# EAGLE board SparkFun-Photon-Wearable-Shield-Panel-v10 (EAGLE 7.3.0)
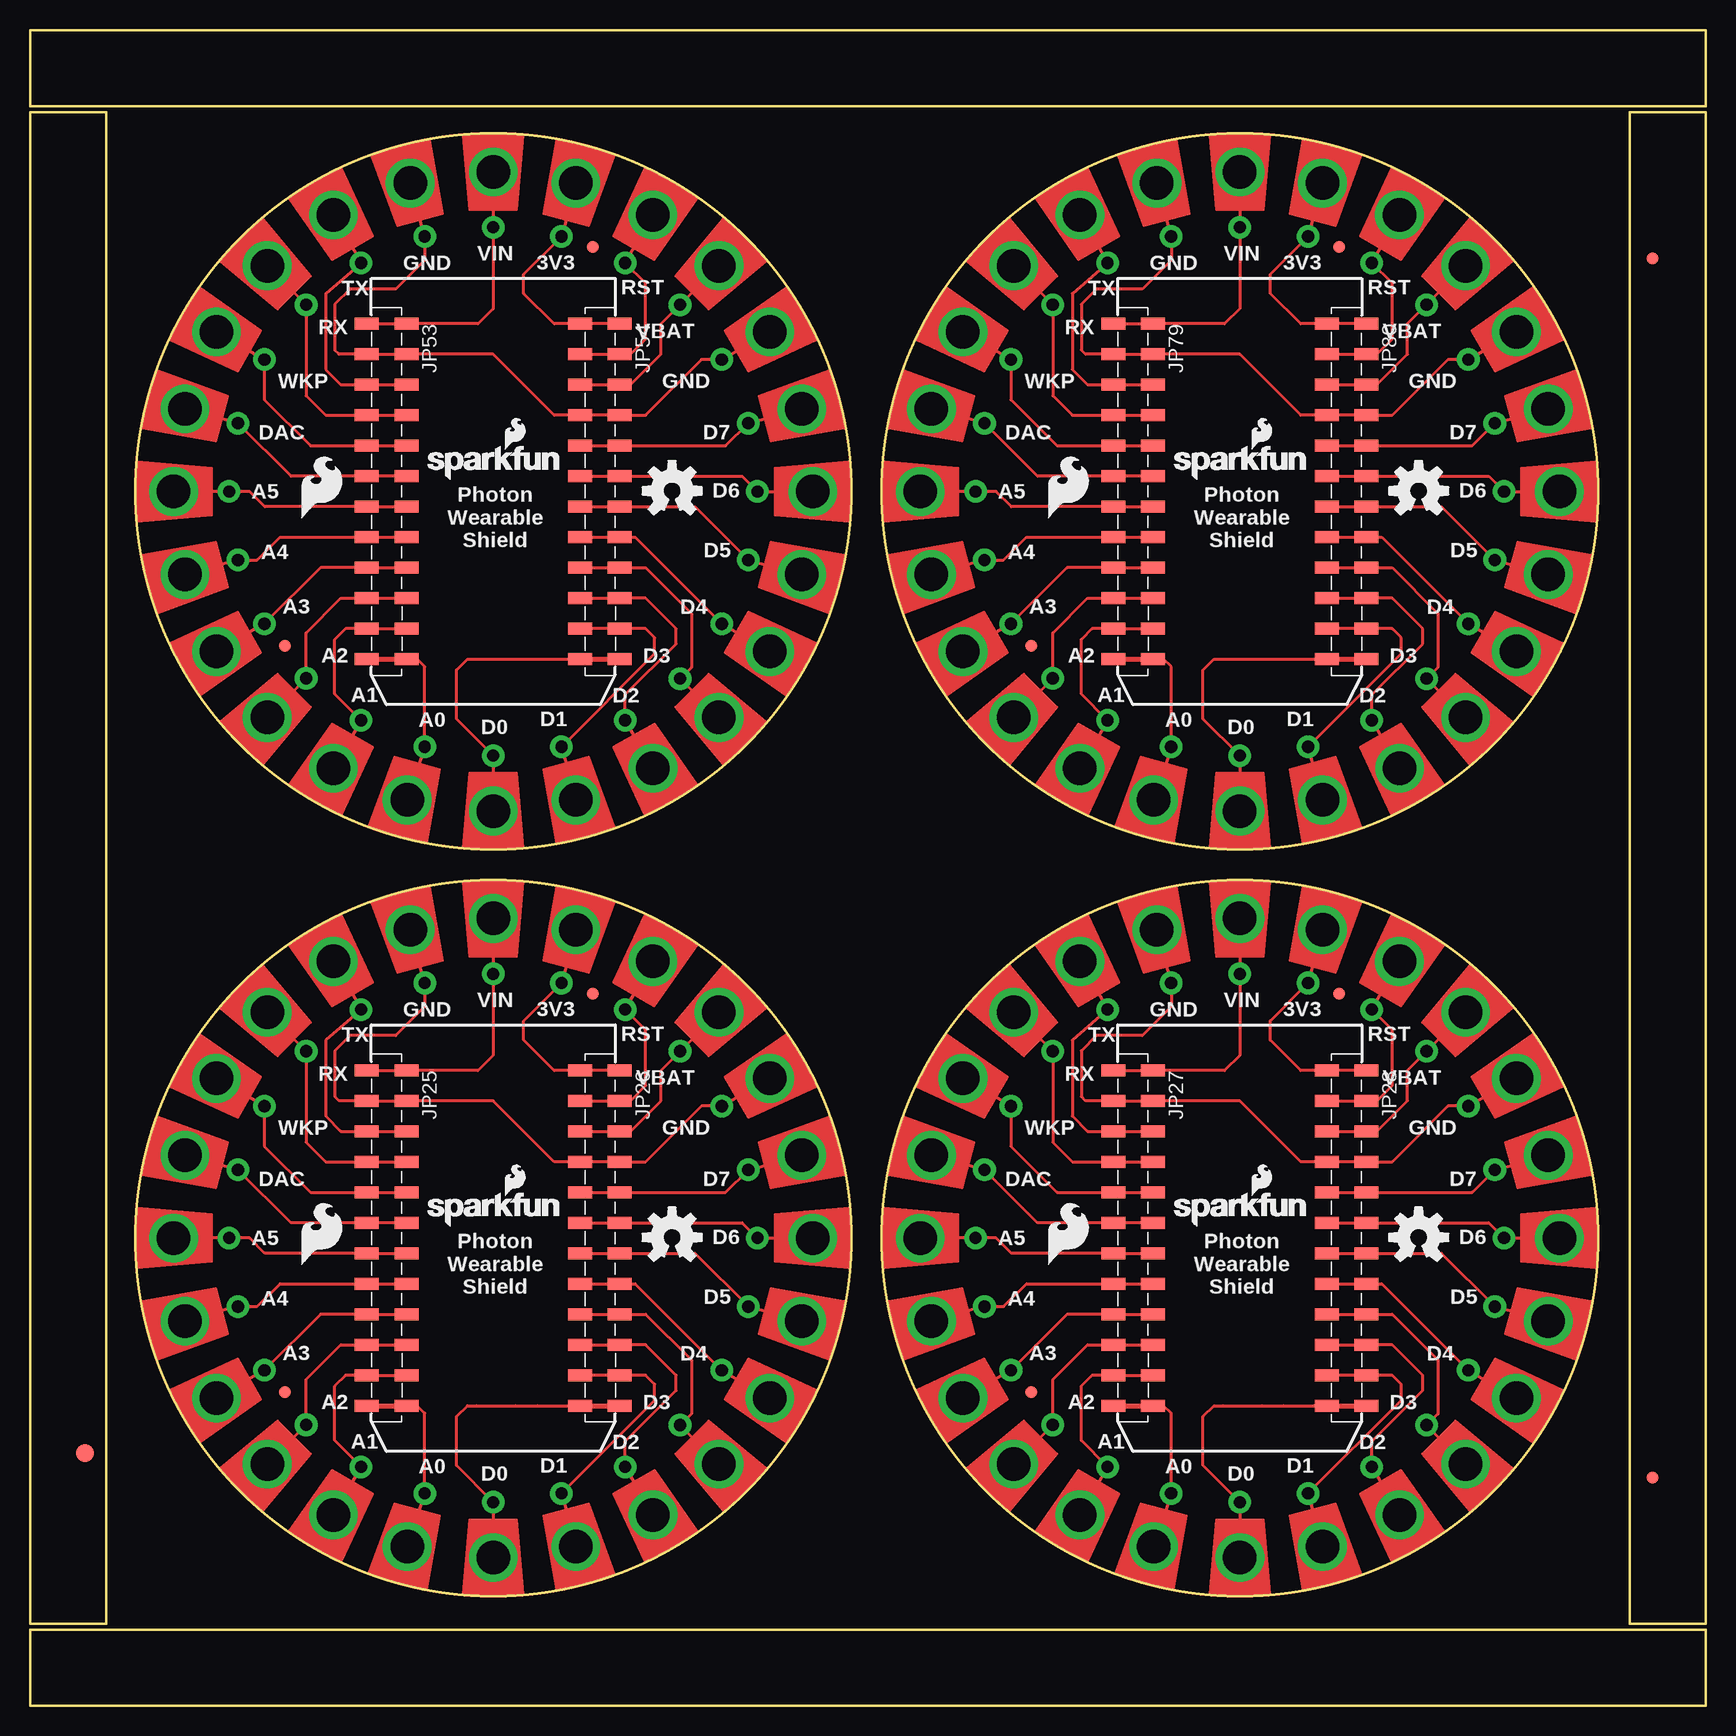
[diagram p0: board, top side]
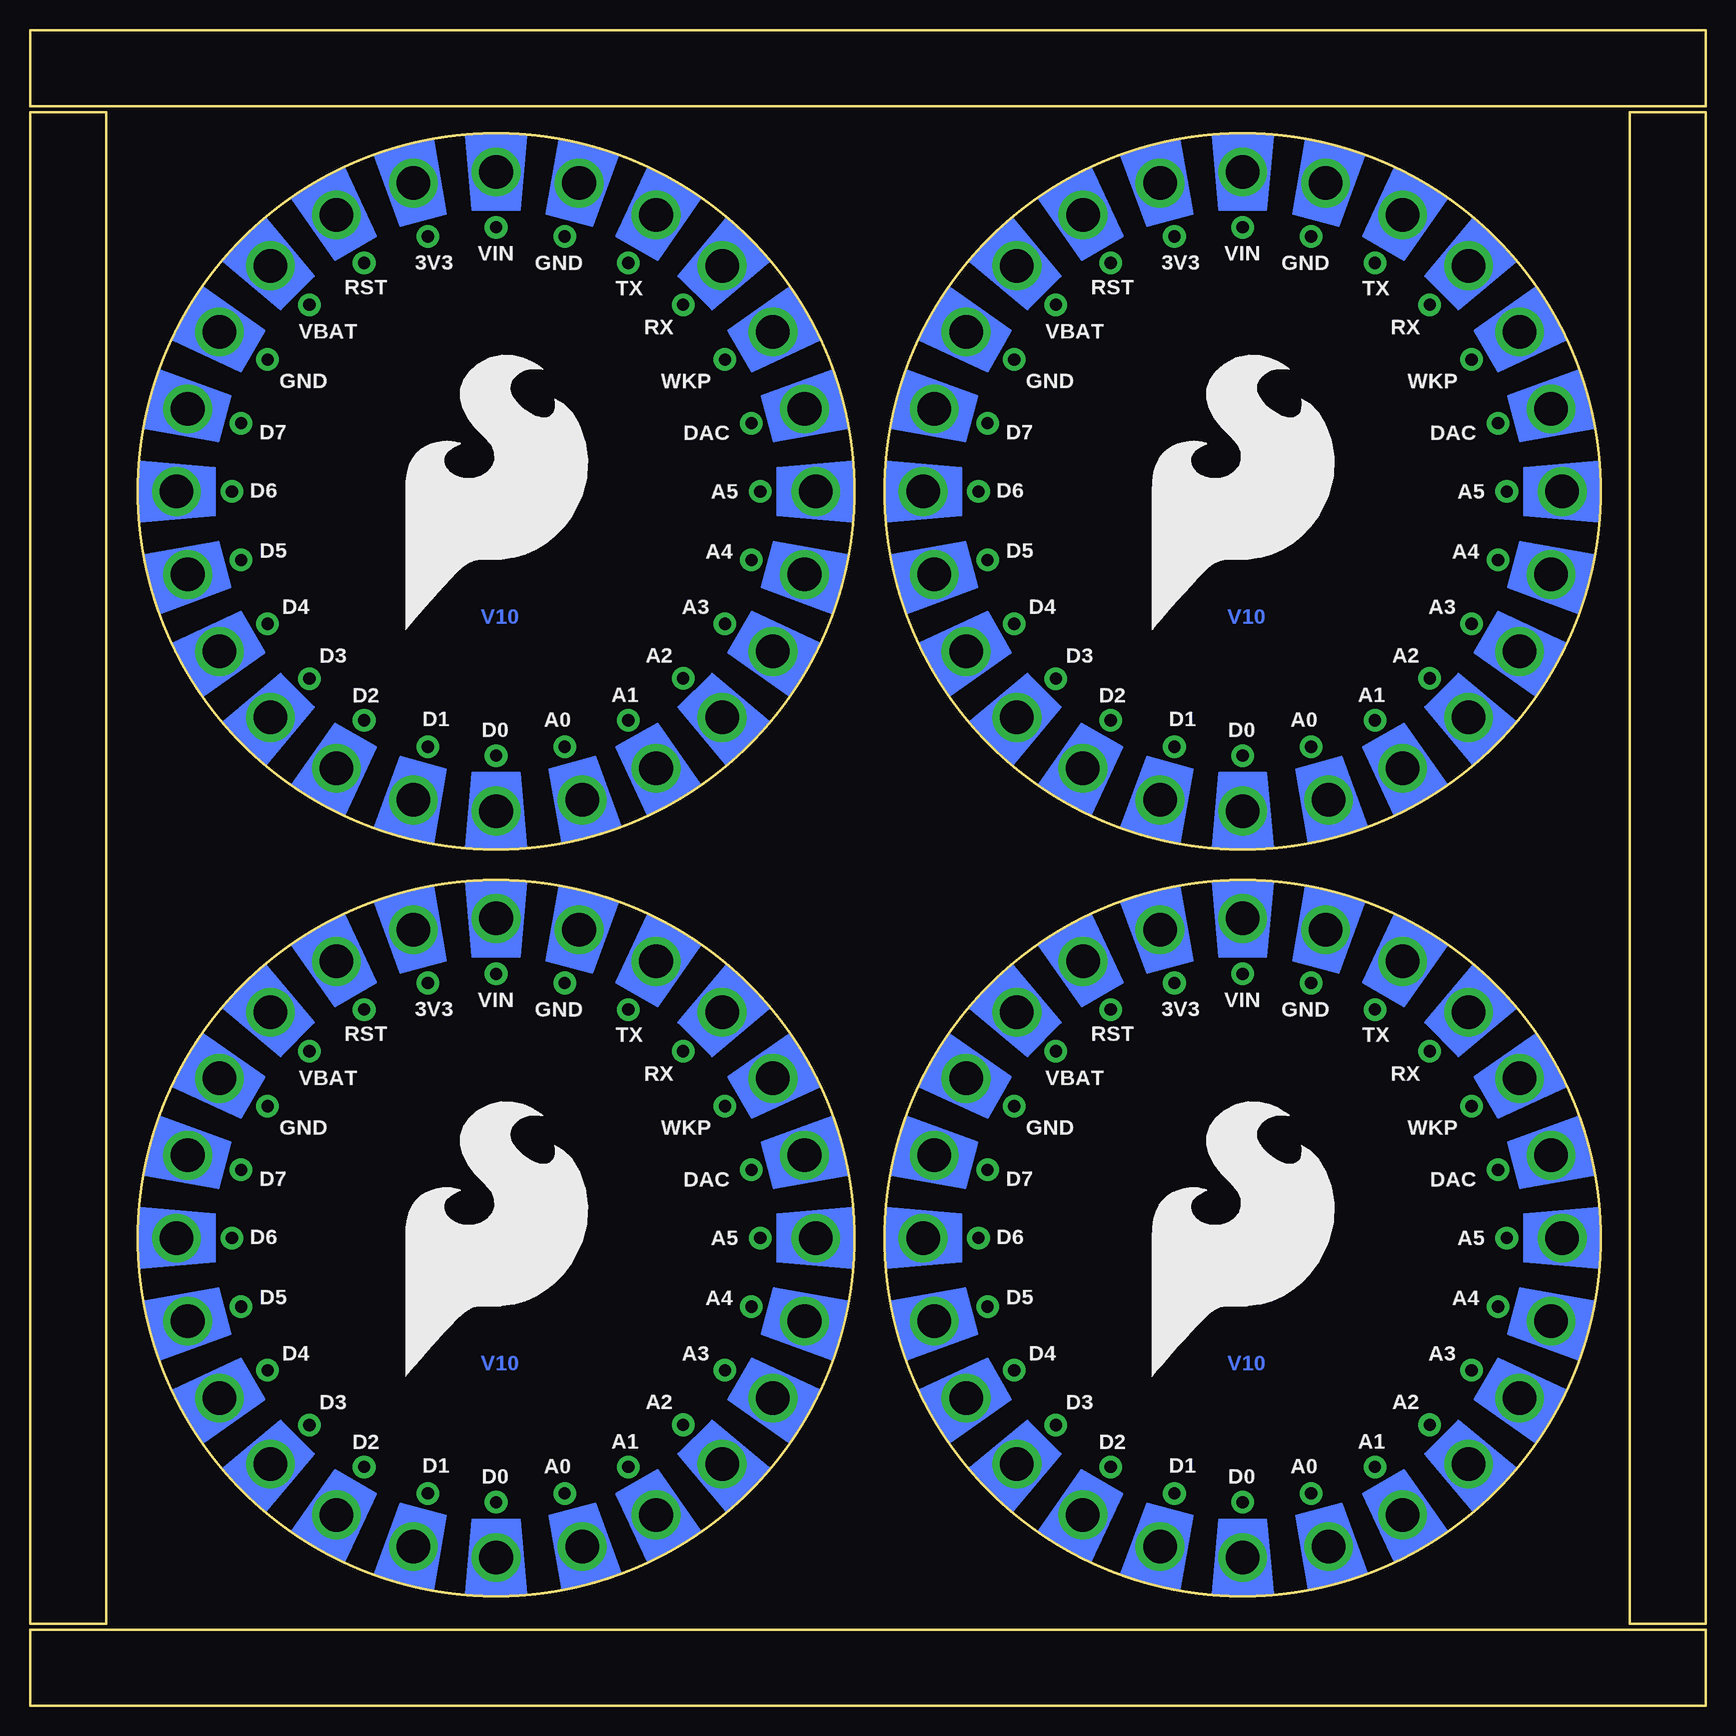
[diagram p1: board, bottom side, seen from below]

Size 139.7 x 139.7 mm. Coordinates in mm from the lower left corner, seen from the top.
Outline: 6.35,81.28 6.35,6.86 0,6.86 0,31.75
Outline: 80.01,0 0,0 0,6.35 30.48,6.35
Outline: 27.94,6.35 139.7,6.35 139.7,0 77.47,0
Outline: 139.7,96.52 139.7,6.86 133.35,6.86 133.35,46.99
Outline: 133.35,45.72 133.35,132.84 139.7,132.84 139.7,95.25
Outline: 59.69,139.7 139.7,139.7 139.7,133.35 109.22,133.35
Outline: 110.49,133.35 0,133.35 0,139.7 60.96,139.7
Outline: 0,30.48 0,132.84 6.35,132.84 6.35,80.01
Outline: circle at 38.62,39 radius 29.84
Outline: circle at 100.85,39 radius 29.84
Outline: circle at 38.62,101.23 radius 29.84
Outline: circle at 100.85,101.23 radius 29.84
Copper layers (1*16): Top 0.035mm / dielectric 1.5mm / Bottom 0.035mm
Design rules "default *": minimum track width 10mil, minimum drill 24mil, track to track 8mil, track to pad 8mil, pad to pad 8mil, via to via 8mil, smd to smd 8mil, copper to edge 40mil, drill to drill 8mil, minimum pad ring 10mil, minimum via ring 8mil, stop-mask expansion 4mil, vias tented up to drill 0mil, thermal gap 10mil

## Footprints (pad centres in the part's own frame; a part is rotated, then mirrored left to right if it is on the bottom)
FIDUCIAL-1.5X3 = smd 1.5 x 1.5: 1 0,0
FIDUCIAL-1X2 = smd 1 x 1: 1 0,0
PAD-LONG-2-SIDED = drill 2.794 pad 4.064: 1 3.205,0
1X01NS = drill 1.016 pad 1.88: 1 0,0
1X12_SMD_COMBINED = smd 1 x 2: 1A 0,1.65; 1B 0,-1.65; 2A 2.54,1.65; 2B 2.54,-1.65; 3A 5.08,1.65; 3B 5.08,-1.65; 4A 7.62,1.65; 4B 7.62,-1.65; 5A 10.16,1.65; 5B 10.16,-1.65; 6A 12.7,1.65; 6B 12.7,-1.65; 7A 15.24,1.65; 7B 15.24,-1.65; 8A 17.78,1.65; 8B 17.78,-1.65; 9A 20.32,1.65; 9B 20.32,-1.65; 10A 22.86,1.65; 10B 22.86,-1.65; 11A 25.4,1.65; 11B 25.4,-1.65; 12A 27.94,1.65; 12B 27.94,-1.65

## Placement (x,y rotation side)
E$1  [FIDUCIAL-1.5X3]  4.57,21.08 0 top
E$4  [FIDUCIAL-1X2]  135.25,19.05 0 top
E$5  [FIDUCIAL-1X2]  135.25,120.65 180 top
FID1  FIDUCIAL1X2  [FIDUCIAL-1X2]  46.91,59.38 0 top
FID2  FIDUCIAL1X2  [FIDUCIAL-1X2]  21.24,26.15 0 top
FID3  FIDUCIAL1X2  [FIDUCIAL-1X2]  109.14,59.38 0 top
FID4  FIDUCIAL1X2  [FIDUCIAL-1X2]  83.47,26.15 0 top
FID5  FIDUCIAL1X2  [FIDUCIAL-1X2]  46.91,121.61 0 top
FID6  FIDUCIAL1X2  [FIDUCIAL-1X2]  21.24,88.38 0 top
FID7  FIDUCIAL1X2  [FIDUCIAL-1X2]  109.14,121.61 0 top
FID8  FIDUCIAL1X2  [FIDUCIAL-1X2]  83.47,88.38 0 top
J1  PAD  [PAD-LONG-2-SIDED]  38.62,68.85 270 top
J2  PAD  [PAD-LONG-2-SIDED]  30.87,67.8 285 top
J3  PAD  [PAD-LONG-2-SIDED]  23.68,64.83 300 top
J4  PAD  [PAD-LONG-2-SIDED]  17.51,60.08 315 top
J5  PAD  [PAD-LONG-2-SIDED]  12.76,53.91 330 top
J6  PAD  [PAD-LONG-2-SIDED]  9.81,46.72 345 top
J7  PAD  [PAD-LONG-2-SIDED]  8.77,39 0 top
J8  PAD  [PAD-LONG-2-SIDED]  9.81,31.25 15 top
J9  PAD  [PAD-LONG-2-SIDED]  12.76,24.07 30 top
J10  PAD  [PAD-LONG-2-SIDED]  17.51,17.89 45 top
J11  PAD  [PAD-LONG-2-SIDED]  23.68,13.14 60 top
J12  PAD  [PAD-LONG-2-SIDED]  30.62,10.2 75 top
J13  PAD  [PAD-LONG-2-SIDED]  46.34,67.8 255 top
J14  PAD  [PAD-LONG-2-SIDED]  53.53,64.83 240 top
J15  PAD  [PAD-LONG-2-SIDED]  59.7,60.08 225 top
J16  PAD  [PAD-LONG-2-SIDED]  64.45,53.91 210 top
J17  PAD  [PAD-LONG-2-SIDED]  67.42,46.72 195 top
J18  PAD  [PAD-LONG-2-SIDED]  68.46,39 180 top
J19  PAD  [PAD-LONG-2-SIDED]  67.42,31.25 165 top
J20  PAD  [PAD-LONG-2-SIDED]  64.45,24.07 150 top
J21  PAD  [PAD-LONG-2-SIDED]  59.7,17.89 135 top
J22  PAD  [PAD-LONG-2-SIDED]  53.54,13.14 120 top
J23  PAD  [PAD-LONG-2-SIDED]  46.34,10.2 105 top
J24  PAD  [PAD-LONG-2-SIDED]  38.62,9.16 90 top
J25  PAD  [PAD-LONG-2-SIDED]  100.85,68.85 270 top
J26  PAD  [PAD-LONG-2-SIDED]  93.1,67.8 285 top
J27  PAD  [PAD-LONG-2-SIDED]  85.91,64.83 300 top
J28  PAD  [PAD-LONG-2-SIDED]  79.74,60.08 315 top
J29  PAD  [PAD-LONG-2-SIDED]  74.99,53.91 330 top
J30  PAD  [PAD-LONG-2-SIDED]  72.04,46.72 345 top
J31  PAD  [PAD-LONG-2-SIDED]  71,39 0 top
J32  PAD  [PAD-LONG-2-SIDED]  72.04,31.25 15 top
J33  PAD  [PAD-LONG-2-SIDED]  74.99,24.07 30 top
J34  PAD  [PAD-LONG-2-SIDED]  79.74,17.89 45 top
J35  PAD  [PAD-LONG-2-SIDED]  85.91,13.14 60 top
J36  PAD  [PAD-LONG-2-SIDED]  92.85,10.2 75 top
J37  PAD  [PAD-LONG-2-SIDED]  100.85,9.16 90 top
J38  PAD  [PAD-LONG-2-SIDED]  108.57,10.2 105 top
J39  PAD  [PAD-LONG-2-SIDED]  115.77,13.14 120 top
J40  PAD  [PAD-LONG-2-SIDED]  121.93,17.89 135 top
J41  PAD  [PAD-LONG-2-SIDED]  126.68,24.07 150 top
J42  PAD  [PAD-LONG-2-SIDED]  129.65,31.25 165 top
J43  PAD  [PAD-LONG-2-SIDED]  130.69,39 180 top
J44  PAD  [PAD-LONG-2-SIDED]  129.65,46.72 195 top
J45  PAD  [PAD-LONG-2-SIDED]  126.68,53.91 210 top
J46  PAD  [PAD-LONG-2-SIDED]  121.93,60.08 225 top
J47  PAD  [PAD-LONG-2-SIDED]  115.76,64.83 240 top
J48  PAD  [PAD-LONG-2-SIDED]  108.57,67.8 255 top
J49  PAD  [PAD-LONG-2-SIDED]  38.62,131.08 270 top
J50  PAD  [PAD-LONG-2-SIDED]  30.87,130.03 285 top
J51  PAD  [PAD-LONG-2-SIDED]  23.68,127.06 300 top
J52  PAD  [PAD-LONG-2-SIDED]  17.51,122.31 315 top
J53  PAD  [PAD-LONG-2-SIDED]  12.76,116.14 330 top
J54  PAD  [PAD-LONG-2-SIDED]  9.81,108.95 345 top
J55  PAD  [PAD-LONG-2-SIDED]  8.77,101.23 0 top
J56  PAD  [PAD-LONG-2-SIDED]  9.81,93.48 15 top
J57  PAD  [PAD-LONG-2-SIDED]  12.76,86.3 30 top
J58  PAD  [PAD-LONG-2-SIDED]  17.51,80.12 45 top
J59  PAD  [PAD-LONG-2-SIDED]  23.68,75.37 60 top
J60  PAD  [PAD-LONG-2-SIDED]  30.62,72.43 75 top
J61  PAD  [PAD-LONG-2-SIDED]  38.62,71.39 90 top
J62  PAD  [PAD-LONG-2-SIDED]  46.34,72.43 105 top
J63  PAD  [PAD-LONG-2-SIDED]  53.54,75.37 120 top
J64  PAD  [PAD-LONG-2-SIDED]  59.7,80.12 135 top
J65  PAD  [PAD-LONG-2-SIDED]  64.45,86.3 150 top
J66  PAD  [PAD-LONG-2-SIDED]  67.42,93.48 165 top
J67  PAD  [PAD-LONG-2-SIDED]  68.46,101.23 180 top
J68  PAD  [PAD-LONG-2-SIDED]  67.42,108.95 195 top
J69  PAD  [PAD-LONG-2-SIDED]  64.45,116.14 210 top
J70  PAD  [PAD-LONG-2-SIDED]  59.7,122.31 225 top
J71  PAD  [PAD-LONG-2-SIDED]  53.53,127.06 240 top
J72  PAD  [PAD-LONG-2-SIDED]  46.34,130.03 255 top
J73  PAD  [PAD-LONG-2-SIDED]  100.85,131.08 270 top
J74  PAD  [PAD-LONG-2-SIDED]  93.1,130.03 285 top
J75  PAD  [PAD-LONG-2-SIDED]  85.91,127.06 300 top
J76  PAD  [PAD-LONG-2-SIDED]  79.74,122.31 315 top
J77  PAD  [PAD-LONG-2-SIDED]  74.99,116.14 330 top
J78  PAD  [PAD-LONG-2-SIDED]  72.04,108.95 345 top
J79  PAD  [PAD-LONG-2-SIDED]  71,101.23 0 top
J80  PAD  [PAD-LONG-2-SIDED]  72.04,93.48 15 top
J81  PAD  [PAD-LONG-2-SIDED]  74.99,86.3 30 top
J82  PAD  [PAD-LONG-2-SIDED]  79.74,80.12 45 top
J83  PAD  [PAD-LONG-2-SIDED]  85.91,75.37 60 top
J84  PAD  [PAD-LONG-2-SIDED]  92.85,72.43 75 top
J85  PAD  [PAD-LONG-2-SIDED]  100.85,71.39 90 top
J86  PAD  [PAD-LONG-2-SIDED]  108.57,72.43 105 top
J87  PAD  [PAD-LONG-2-SIDED]  115.77,75.37 120 top
J88  PAD  [PAD-LONG-2-SIDED]  121.93,80.12 135 top
J89  PAD  [PAD-LONG-2-SIDED]  126.68,86.3 150 top
J90  PAD  [PAD-LONG-2-SIDED]  129.65,93.48 165 top
J91  PAD  [PAD-LONG-2-SIDED]  130.69,101.23 180 top
J92  PAD  [PAD-LONG-2-SIDED]  129.65,108.95 195 top
J93  PAD  [PAD-LONG-2-SIDED]  126.68,116.14 210 top
J94  PAD  [PAD-LONG-2-SIDED]  121.93,122.31 225 top
J95  PAD  [PAD-LONG-2-SIDED]  115.76,127.06 240 top
J96  PAD  [PAD-LONG-2-SIDED]  108.57,130.03 255 top
JP1  M01SMDNS  [1X01NS]  38.62,61.02 270 top
JP2  M01SMDNS  [1X01NS]  32.9,60.26 285 top
JP3  M01SMDNS  [1X01NS]  27.59,58.05 300 top
JP4  M01SMDNS  [1X01NS]  23.02,54.57 315 top
JP5  M01SMDNS  [1X01NS]  19.54,50 330 top
JP6  M01SMDNS  [1X01NS]  17.33,44.69 345 top
JP7  M01SMDNS  [1X01NS]  16.59,39 0 top
JP8  M01SMDNS  [1X01NS]  17.33,33.29 15 top
JP9  M01SMDNS  [1X01NS]  19.54,27.98 30 top
JP10  M01SMDNS  [1X01NS]  23.02,23.43 45 top
JP11  M01SMDNS  [1X01NS]  27.59,19.93 60 top
JP12  M01SMDNS  [1X01NS]  32.9,17.72 75 top
JP13  M01SMDNS  [1X01NS]  44.31,60.26 255 top
JP14  M01SMDNS  [1X01NS]  49.61,58.05 240 top
JP15  M01SMDNS  [1X01NS]  54.19,54.57 225 top
JP16  M01SMDNS  [1X01NS]  57.67,50 210 top
JP17  M01SMDNS  [1X01NS]  59.88,44.69 195 top
JP18  M01SMDNS  [1X01NS]  60.64,39 180 top
JP19  M01SMDNS  [1X01NS]  59.88,33.29 165 top
JP20  M01SMDNS  [1X01NS]  57.67,27.98 150 top
JP21  M01SMDNS  [1X01NS]  54.19,23.4 135 top
JP22  M01SMDNS  [1X01NS]  49.61,19.93 120 top
JP23  M01SMDNS  [1X01NS]  44.31,17.72 105 top
JP24  M01SMDNS  [1X01NS]  38.62,16.98 90 top
JP25  M12SMD_COMBINED  [1X12_SMD_COMBINED]  29.73,52.97 270 top
JP26  M12SMD_COMBINED  [1X12_SMD_COMBINED]  47.51,52.97 270 top
JP27  M12SMD_COMBINED  [1X12_SMD_COMBINED]  91.96,52.97 270 top
JP28  M12SMD_COMBINED  [1X12_SMD_COMBINED]  109.74,52.97 270 top
JP29  M01SMDNS  [1X01NS]  100.85,61.02 270 top
JP30  M01SMDNS  [1X01NS]  89.82,58.05 300 top
JP31  M01SMDNS  [1X01NS]  95.13,60.26 285 top
JP32  M01SMDNS  [1X01NS]  85.25,54.57 315 top
JP33  M01SMDNS  [1X01NS]  81.77,50 330 top
JP34  M01SMDNS  [1X01NS]  79.56,44.69 345 top
JP35  M01SMDNS  [1X01NS]  78.82,39 0 top
JP36  M01SMDNS  [1X01NS]  79.56,33.29 15 top
JP37  M01SMDNS  [1X01NS]  81.77,27.98 30 top
JP38  M01SMDNS  [1X01NS]  85.25,23.43 45 top
JP39  M01SMDNS  [1X01NS]  89.82,19.93 60 top
JP40  M01SMDNS  [1X01NS]  95.13,17.72 75 top
JP41  M01SMDNS  [1X01NS]  100.85,16.98 90 top
JP42  M01SMDNS  [1X01NS]  106.54,17.72 105 top
JP43  M01SMDNS  [1X01NS]  111.84,19.93 120 top
JP44  M01SMDNS  [1X01NS]  116.42,23.4 135 top
JP45  M01SMDNS  [1X01NS]  119.9,27.98 150 top
JP46  M01SMDNS  [1X01NS]  122.11,33.29 165 top
JP47  M01SMDNS  [1X01NS]  122.87,39 180 top
JP48  M01SMDNS  [1X01NS]  122.11,44.69 195 top
JP49  M01SMDNS  [1X01NS]  119.9,50 210 top
JP50  M01SMDNS  [1X01NS]  116.42,54.57 225 top
JP51  M01SMDNS  [1X01NS]  111.84,58.05 240 top
JP52  M01SMDNS  [1X01NS]  106.54,60.26 255 top
JP53  M12SMD_COMBINED  [1X12_SMD_COMBINED]  29.73,115.2 270 top
JP54  M12SMD_COMBINED  [1X12_SMD_COMBINED]  47.51,115.2 270 top
JP55  M01SMDNS  [1X01NS]  38.62,123.25 270 top
JP56  M01SMDNS  [1X01NS]  27.59,120.28 300 top
JP57  M01SMDNS  [1X01NS]  32.9,122.49 285 top
JP58  M01SMDNS  [1X01NS]  23.02,116.8 315 top
JP59  M01SMDNS  [1X01NS]  19.54,112.23 330 top
JP60  M01SMDNS  [1X01NS]  17.33,106.92 345 top
JP61  M01SMDNS  [1X01NS]  16.59,101.23 0 top
JP62  M01SMDNS  [1X01NS]  17.33,95.52 15 top
JP63  M01SMDNS  [1X01NS]  19.54,90.21 30 top
JP64  M01SMDNS  [1X01NS]  23.02,85.66 45 top
JP65  M01SMDNS  [1X01NS]  27.59,82.16 60 top
JP66  M01SMDNS  [1X01NS]  32.9,79.95 75 top
JP67  M01SMDNS  [1X01NS]  38.62,79.21 90 top
JP68  M01SMDNS  [1X01NS]  44.31,79.95 105 top
JP69  M01SMDNS  [1X01NS]  49.61,82.16 120 top
JP70  M01SMDNS  [1X01NS]  54.19,85.63 135 top
JP71  M01SMDNS  [1X01NS]  57.67,90.21 150 top
JP72  M01SMDNS  [1X01NS]  59.88,95.52 165 top
JP73  M01SMDNS  [1X01NS]  60.64,101.23 180 top
JP74  M01SMDNS  [1X01NS]  59.88,106.92 195 top
JP75  M01SMDNS  [1X01NS]  57.67,112.23 210 top
JP76  M01SMDNS  [1X01NS]  54.19,116.8 225 top
JP77  M01SMDNS  [1X01NS]  49.61,120.28 240 top
JP78  M01SMDNS  [1X01NS]  44.31,122.49 255 top
JP79  M12SMD_COMBINED  [1X12_SMD_COMBINED]  91.96,115.2 270 top
JP80  M12SMD_COMBINED  [1X12_SMD_COMBINED]  109.74,115.2 270 top
JP81  M01SMDNS  [1X01NS]  100.85,123.25 270 top
JP82  M01SMDNS  [1X01NS]  89.82,120.28 300 top
JP83  M01SMDNS  [1X01NS]  95.13,122.49 285 top
JP84  M01SMDNS  [1X01NS]  85.25,116.8 315 top
JP85  M01SMDNS  [1X01NS]  81.77,112.23 330 top
JP86  M01SMDNS  [1X01NS]  79.56,106.92 345 top
JP87  M01SMDNS  [1X01NS]  78.82,101.23 0 top
JP88  M01SMDNS  [1X01NS]  79.56,95.52 15 top
JP89  M01SMDNS  [1X01NS]  81.77,90.21 30 top
JP90  M01SMDNS  [1X01NS]  85.25,85.66 45 top
JP91  M01SMDNS  [1X01NS]  89.82,82.16 60 top
JP92  M01SMDNS  [1X01NS]  95.13,79.95 75 top
JP93  M01SMDNS  [1X01NS]  100.85,79.21 90 top
JP94  M01SMDNS  [1X01NS]  106.54,79.95 105 top
JP95  M01SMDNS  [1X01NS]  111.84,82.16 120 top
JP96  M01SMDNS  [1X01NS]  116.42,85.63 135 top
JP97  M01SMDNS  [1X01NS]  119.9,90.21 150 top
JP98  M01SMDNS  [1X01NS]  122.11,95.52 165 top
JP99  M01SMDNS  [1X01NS]  122.87,101.23 180 top
JP100  M01SMDNS  [1X01NS]  122.11,106.92 195 top
JP101  M01SMDNS  [1X01NS]  119.9,112.23 210 top
JP102  M01SMDNS  [1X01NS]  116.42,116.8 225 top
JP103  M01SMDNS  [1X01NS]  111.84,120.28 240 top
JP104  M01SMDNS  [1X01NS]  106.54,122.49 255 top
LOGO1  SFE_LOGO_FLAME.2_INCH  [SFE_LOGO_FLAME_.2]  22.3,36.52 0 top
LOGO2  OSHW-LOGOM  [OSHW-LOGO-M]  53.52,39.06 0 top
LOGO3  SFE_LOGO_NAME_FLAME.1_INCH  [SFE_LOGO_NAME_FLAME_.1]  32.74,39.89 0 top
LOGO4  SFE_LOGO_FLAME.2_INCH  [SFE_LOGO_FLAME_.2]  84.53,36.52 0 top
LOGO5  OSHW-LOGOM  [OSHW-LOGO-M]  115.75,39.06 0 top
LOGO6  SFE_LOGO_NAME_FLAME.1_INCH  [SFE_LOGO_NAME_FLAME_.1]  94.97,39.89 0 top
LOGO7  SFE_LOGO_FLAME.2_INCH  [SFE_LOGO_FLAME_.2]  22.3,98.75 0 top
LOGO8  OSHW-LOGOM  [OSHW-LOGO-M]  53.52,101.29 0 top
LOGO9  SFE_LOGO_NAME_FLAME.1_INCH  [SFE_LOGO_NAME_FLAME_.1]  32.74,102.12 0 top
LOGO10  SFE_LOGO_FLAME.2_INCH  [SFE_LOGO_FLAME_.2]  84.53,98.75 0 top
LOGO11  OSHW-LOGOM  [OSHW-LOGO-M]  115.75,101.29 0 top
LOGO12  SFE_LOGO_NAME_FLAME.1_INCH  [SFE_LOGO_NAME_FLAME_.1]  94.97,102.12 0 top
U$1  [SFE_LOGO_FLAME_.9]  108.68,27.24 0 bottom
U$2  [SFE_LOGO_FLAME_.9]  46.45,27.24 0 bottom
U$3  [SFE_LOGO_FLAME_.9]  46.45,89.47 0 bottom
U$4  [SFE_LOGO_FLAME_.9]  108.68,89.47 0 bottom

## Library data of the parts
E$1 = SparkFun-Retired
E$4 E$5 FID1-FID8 LOGO1-LOGO12 U$1-U$4 = SparkFun-Aesthetics
J1-J96 = Photon_wearable
JP1-JP24 JP29-JP52 JP55-JP78 JP81-JP104 = SparkFun-Connectors
JP25-JP28 JP53 JP54 JP79 JP80 = SparkFun-Connectors; PROD_ID: CONN-12614

## Nets
3V1: J48.1 JP28.1A JP28.1B JP52.1
3V2: J72.1 JP54.1A JP54.1B JP78.1
3V3: J13.1 JP13.1 JP26.1A JP26.1B
3V4: J96.1 JP80.1A JP80.1B JP104.1
A0: J12.1 JP12.1 JP25.12A JP25.12B
A1: J11.1 JP11.1 JP25.11A JP25.11B
A2: J10.1 JP10.1 JP25.10A JP25.10B
A3: J9.1 JP9.1 JP25.9A JP25.9B
A4: J8.1 JP8.1 JP25.8A JP25.8B
A5: J7.1 JP7.1 JP25.7A JP25.7B
A6: J31.1 JP27.7A JP27.7B JP35.1
A7: J32.1 JP27.8A JP27.8B JP36.1
A8: J33.1 JP27.9A JP27.9B JP37.1
A9: J34.1 JP27.10A JP27.10B JP38.1
A10: J35.1 JP27.11A JP27.11B JP39.1
A11: J36.1 JP27.12A JP27.12B JP40.1
A12: J55.1 JP53.7A JP53.7B JP61.1
A13: J56.1 JP53.8A JP53.8B JP62.1
A14: J57.1 JP53.9A JP53.9B JP63.1
A15: J58.1 JP53.10A JP53.10B JP64.1
A16: J59.1 JP53.11A JP53.11B JP65.1
A17: J60.1 JP53.12A JP53.12B JP66.1
A18: J79.1 JP79.7A JP79.7B JP87.1
A19: J80.1 JP79.8A JP79.8B JP88.1
A20: J81.1 JP79.9A JP79.9B JP89.1
A21: J82.1 JP79.10A JP79.10B JP90.1
A22: J83.1 JP79.11A JP79.11B JP91.1
A23: J84.1 JP79.12A JP79.12B JP92.1
D0: J24.1 JP24.1 JP26.12A JP26.12B
D1: J23.1 JP23.1 JP26.11A JP26.11B
D2: J22.1 JP22.1 JP26.10A JP26.10B
D3: J21.1 JP21.1 JP26.9A JP26.9B
D4: J20.1 JP20.1 JP26.8A JP26.8B
D5: J19.1 JP19.1 JP26.7A JP26.7B
D6: J18.1 JP18.1 JP26.6A JP26.6B
D7: J17.1 JP17.1 JP26.5A JP26.5B
D8: J44.1 JP28.5A JP28.5B JP48.1
D9: J43.1 JP28.6A JP28.6B JP47.1
D10: J42.1 JP28.7A JP28.7B JP46.1
D11: J41.1 JP28.8A JP28.8B JP45.1
D12: J40.1 JP28.9A JP28.9B JP44.1
D13: J39.1 JP28.10A JP28.10B JP43.1
D14: J38.1 JP28.11A JP28.11B JP42.1
D15: J37.1 JP28.12A JP28.12B JP41.1
D16: J68.1 JP54.5A JP54.5B JP74.1
D17: J67.1 JP54.6A JP54.6B JP73.1
D18: J66.1 JP54.7A JP54.7B JP72.1
D19: J65.1 JP54.8A JP54.8B JP71.1
D20: J64.1 JP54.9A JP54.9B JP70.1
D21: J63.1 JP54.10A JP54.10B JP69.1
D22: J62.1 JP54.11A JP54.11B JP68.1
D23: J61.1 JP54.12A JP54.12B JP67.1
D24: J92.1 JP80.5A JP80.5B JP100.1
D25: J91.1 JP80.6A JP80.6B JP99.1
D26: J90.1 JP80.7A JP80.7B JP98.1
D27: J89.1 JP80.8A JP80.8B JP97.1
D28: J88.1 JP80.9A JP80.9B JP96.1
D29: J87.1 JP80.10A JP80.10B JP95.1
D30: J86.1 JP80.11A JP80.11B JP94.1
D31: J85.1 JP80.12A JP80.12B JP93.1
DAC: J6.1 JP6.1 JP25.6A JP25.6B
DAC1: J30.1 JP27.6A JP27.6B JP34.1
DAC2: J54.1 JP53.6A JP53.6B JP60.1
DAC3: J78.1 JP79.6A JP79.6B JP86.1
GND: J2.1 J16.1 JP2.1 JP16.1 JP25.2A JP25.2B JP26.4A JP26.4B
GND1: J26.1 J45.1 JP27.2A JP27.2B JP28.4A JP28.4B JP31.1 JP49.1
GND2: J50.1 J69.1 JP53.2A JP53.2B JP54.4A JP54.4B JP57.1 JP75.1
GND3: J74.1 J93.1 JP79.2A JP79.2B JP80.4A JP80.4B JP83.1 JP101.1
RST: J14.1 JP14.1 JP26.2A JP26.2B
RST1: J47.1 JP28.2A JP28.2B JP51.1
RST2: J71.1 JP54.2A JP54.2B JP77.1
RST3: J95.1 JP80.2A JP80.2B JP103.1
RX: J4.1 JP4.1 JP25.4A JP25.4B
RX1: J28.1 JP27.4A JP27.4B JP32.1
RX2: J52.1 JP53.4A JP53.4B JP58.1
RX3: J76.1 JP79.4A JP79.4B JP84.1
TX: J3.1 JP3.1 JP25.3A JP25.3B
TX1: J27.1 JP27.3A JP27.3B JP30.1
TX2: J51.1 JP53.3A JP53.3B JP56.1
TX3: J75.1 JP79.3A JP79.3B JP82.1
VBAT: J15.1 JP15.1 JP26.3A JP26.3B
VBAT1: J46.1 JP28.3A JP28.3B JP50.1
VBAT2: J70.1 JP54.3A JP54.3B JP76.1
VBAT3: J94.1 JP80.3A JP80.3B JP102.1
VIN: J1.1 JP1.1 JP25.1A JP25.1B
VIN1: J25.1 JP27.1A JP27.1B JP29.1
VIN2: J49.1 JP53.1A JP53.1B JP55.1
VIN3: J73.1 JP79.1A JP79.1B JP81.1
WKP: J5.1 JP5.1 JP25.5A JP25.5B
WKP1: J29.1 JP27.5A JP27.5B JP33.1
WKP2: J53.1 JP53.5A JP53.5B JP59.1
WKP3: J77.1 JP79.5A JP79.5B JP85.1

## Tracks (layer width: path | path; a pad name or v marks a point on that pad's centre or on a via)
3V1
  Top 0.254: JP28.1A JP28.1B 105.93,52.97 103.39,55.51 103.39,57.11 JP52.1 | JP52.1 106.54,60.29 106.56,60.31 | J48.1 JP52.1
3V2
  Top 0.254: JP54.1A JP54.1B 43.7,115.2 41.16,117.74 41.16,119.34 JP78.1 | JP78.1 44.31,122.52 44.33,122.54 | J72.1 JP78.1
3V3
  Top 0.254: JP26.1A JP26.1B 43.7,52.97 41.16,55.51 41.16,57.11 JP13.1 | JP13.1 44.31,60.29 44.33,60.31 | J13.1 JP13.1
3V4
  Top 0.254: JP80.1A JP80.1B 105.93,115.2 103.39,117.74 103.39,119.34 JP104.1 | JP104.1 106.54,122.52 106.56,122.54 | J96.1 JP104.1
A0
  Top 0.254: J12.1 JP12.1 32.9,24.39 32.27,25.03 JP25.12A
  Top 0.406: JP25.12B JP25.12A
A1
  Top 0.254: J11.1 JP11.1 25.4,22.12 25.4,26.67 26.3,27.57 JP25.11B JP25.11A
A2
  Top 0.254: JP25.10A JP25.10B 25.92,30.11 23.02,27.21 JP10.1 J10.1
A3
  Top 0.254: JP25.9A JP25.9B 24.21,32.65 JP9.1 J9.1
A4
  Top 0.254: 32.27,35.19 JP25.8A JP25.8B 20.84,35.19 18.93,33.28 JP8.1 J8.1
A5
  Top 0.254: JP25.7A JP25.7B 19.57,37.73 18.3,39 JP7.1 J7.1
A6
  Top 0.254: JP27.7A JP27.7B 81.8,37.73 80.53,39 JP35.1 J31.1
A7
  Top 0.254: 94.5,35.19 JP27.8A JP27.8B 83.07,35.19 81.16,33.28 JP36.1 J32.1
A8
  Top 0.254: JP27.9A JP27.9B 86.44,32.65 JP37.1 J33.1
A9
  Top 0.254: JP27.10A JP27.10B 88.15,30.11 85.25,27.21 JP38.1 J34.1
A10
  Top 0.254: J35.1 JP39.1 87.63,22.12 87.63,26.67 88.53,27.57 JP27.11B JP27.11A
A11
  Top 0.254: J36.1 JP40.1 95.13,24.39 94.5,25.03 JP27.12A
  Top 0.406: JP27.12B JP27.12A
A12
  Top 0.254: JP53.7A JP53.7B 19.57,99.96 18.3,101.23 JP61.1 J55.1
A13
  Top 0.254: 32.27,97.42 JP53.8A JP53.8B 20.84,97.42 18.93,95.52 JP62.1 J56.1
A14
  Top 0.254: JP53.9A JP53.9B 24.21,94.88 JP63.1 J57.1
A15
  Top 0.254: JP53.10A JP53.10B 25.92,92.34 23.02,89.44 JP64.1 J58.1
A16
  Top 0.254: J59.1 JP65.1 25.4,84.35 25.4,88.9 26.3,89.8 JP53.11B JP53.11A
A17
  Top 0.254: J60.1 JP66.1 32.9,86.62 32.27,87.26 JP53.12A
  Top 0.406: JP53.12B JP53.12A
A18
  Top 0.254: JP79.7A JP79.7B 81.8,99.96 80.53,101.23 JP87.1 J79.1
A19
  Top 0.254: 94.5,97.42 JP79.8A JP79.8B 83.07,97.42 81.16,95.52 JP88.1 J80.1
A20
  Top 0.254: JP79.9A JP79.9B 86.44,94.88 JP89.1 J81.1
A21
  Top 0.254: JP79.10A JP79.10B 88.15,92.34 85.25,89.44 JP90.1 J82.1
A22
  Top 0.254: J83.1 JP91.1 87.63,84.35 87.63,88.9 88.53,89.8 JP79.11B JP79.11A
A23
  Top 0.254: J84.1 JP92.1 95.13,86.62 94.5,87.26 JP79.12A
  Top 0.406: JP79.12B JP79.12A
D0
  Top 0.254: J24.1 JP24.1 35.56,20.04 35.56,24.13 36.46,25.03 37.21,25.03 40.46,25.03 42.28,25.03 JP26.12B 44.82,25.03
  Top 0.406: JP26.12B JP26.12A
D1
  Top 0.254: JP26.11B JP26.11A 51.32,27.57 52.07,26.82 52.07,25.48 JP23.1 J23.1
D2
  Top 0.254: JP26.10B JP26.10A 51.32,30.11 53.86,27.57 53.86,26.3 49.61,22.06 JP22.1 J22.1
D3
  Top 0.254: JP26.9B JP26.9A 51.32,32.65 55.13,28.84 55.13,24.34 JP21.1 J21.1
D4
  Top 0.254: JP26.8B JP26.8A 50.45,35.19 JP20.1 J20.1
D5
  Top 0.254: JP26.7B JP26.7A 55.43,37.73 JP19.1 J19.1
D6
  Top 0.254: JP26.6B JP26.6A 59.37,40.27 JP18.1 J18.1
D7
  Top 0.254: JP26.5B JP26.5A 58,42.81 JP17.1 J17.1
D8
  Top 0.254: JP28.5B JP28.5A 120.23,42.81 JP48.1 J44.1
D9
  Top 0.254: JP28.6B JP28.6A 121.6,40.27 JP47.1 J43.1
D10
  Top 0.254: JP28.7B JP28.7A 117.66,37.73 JP46.1 J42.1
D11
  Top 0.254: JP28.8B JP28.8A 112.68,35.19 JP45.1 J41.1
D12
  Top 0.254: JP28.9B JP28.9A 113.55,32.65 117.36,28.84 117.36,24.34 JP44.1 J40.1
D13
  Top 0.254: JP28.10B JP28.10A 113.55,30.11 116.09,27.57 116.09,26.3 111.84,22.06 JP43.1 J39.1
D14
  Top 0.254: JP28.11B JP28.11A 113.55,27.57 114.3,26.82 114.3,25.48 JP42.1 J38.1
D15
  Top 0.254: J37.1 JP41.1 97.79,20.04 97.79,24.13 98.69,25.03 99.44,25.03 102.69,25.03 104.51,25.03 JP28.12B 107.05,25.03
  Top 0.406: JP28.12B JP28.12A
D16
  Top 0.254: JP54.5B JP54.5A 58,105.04 JP74.1 J68.1
D17
  Top 0.254: JP54.6B JP54.6A 59.37,102.5 JP73.1 J67.1
D18
  Top 0.254: JP54.7B JP54.7A 55.43,99.96 JP72.1 J66.1
D19
  Top 0.254: JP54.8B JP54.8A 50.45,97.42 JP71.1 J65.1
D20
  Top 0.254: JP54.9B JP54.9A 51.32,94.88 55.13,91.07 55.13,86.58 JP70.1 J64.1
D21
  Top 0.254: JP54.10B JP54.10A 51.32,92.34 53.86,89.8 53.86,88.53 49.61,84.29 JP69.1 J63.1
D22
  Top 0.254: JP54.11B JP54.11A 51.32,89.8 52.07,89.05 52.07,87.71 JP68.1 J62.1
D23
  Top 0.254: J61.1 JP67.1 35.56,82.27 35.56,86.36 36.46,87.26 37.21,87.26 40.46,87.26 42.28,87.26 JP54.12B 44.82,87.26
  Top 0.406: JP54.12B JP54.12A
D24
  Top 0.254: JP80.5B JP80.5A 120.23,105.04 JP100.1 J92.1
D25
  Top 0.254: JP80.6B JP80.6A 121.6,102.5 JP99.1 J91.1
D26
  Top 0.254: JP80.7B JP80.7A 117.66,99.96 JP98.1 J90.1
D27
  Top 0.254: JP80.8B JP80.8A 112.68,97.42 JP97.1 J89.1
D28
  Top 0.254: JP80.9B JP80.9A 113.55,94.88 117.36,91.07 117.36,86.58 JP96.1 J88.1
D29
  Top 0.254: JP80.10B JP80.10A 113.55,92.34 116.09,89.8 116.09,88.53 111.84,84.29 JP95.1 J87.1
D30
  Top 0.254: JP80.11B JP80.11A 113.55,89.8 114.3,89.05 114.3,87.71 JP94.1 J86.1
D31
  Top 0.254: J85.1 JP93.1 97.79,82.27 97.79,86.36 98.69,87.26 99.44,87.26 102.69,87.26 104.51,87.26 JP80.12B 107.05,87.26
  Top 0.406: JP80.12B JP80.12A
DAC
  Top 0.254: JP25.6A JP25.6B 21.75,40.27 JP6.1 J6.1
DAC1
  Top 0.254: JP27.6A JP27.6B 83.98,40.27 JP34.1 J30.1
DAC2
  Top 0.254: JP53.6A JP53.6B 21.75,102.5 JP60.1 J54.1
DAC3
  Top 0.254: JP79.6A JP79.6B 83.98,102.5 JP86.1 J78.1
GND
  Top 0.254: J2.1 31.94,63.82 JP2.1 32.9,58.3 30.48,55.88 26.67,55.88 25.4,54.61 25.4,50.8 25.77,50.43 JP25.2B JP25.2A 38.62,50.43 43.7,45.35 JP26.4B JP26.4A 51.32,45.35 55.96,50 JP16.1 J16.1
GND1
  Top 0.254: J26.1 94.17,63.82 JP31.1 95.13,58.3 92.71,55.88 88.9,55.88 87.63,54.61 87.63,50.8 88,50.43 JP27.2B JP27.2A 100.85,50.43 105.93,45.35 JP28.4B JP28.4A 113.55,45.35 118.19,50 JP49.1 J45.1
GND2
  Top 0.254: J50.1 31.94,126.05 JP57.1 32.9,120.53 30.48,118.11 26.67,118.11 25.4,116.84 25.4,113.03 25.77,112.66 JP53.2B JP53.2A 38.62,112.66 43.7,107.58 JP54.4B JP54.4A 51.32,107.58 55.96,112.23 JP75.1 J69.1
GND3
  Top 0.254: J74.1 94.17,126.05 JP83.1 95.13,120.53 92.71,118.11 88.9,118.11 87.63,116.84 87.63,113.03 88,112.66 JP79.2B JP79.2A 100.85,112.66 105.93,107.58 JP80.4B JP80.4A 113.55,107.58 118.19,112.23 JP101.1 J93.1
RST
  Top 0.254: JP26.2B JP26.2A 50.05,50.43 51.32,51.7 51.32,56.35 JP14.1 J14.1
RST1
  Top 0.254: JP28.2B JP28.2A 112.28,50.43 113.55,51.7 113.55,56.35 JP51.1 J47.1
RST2
  Top 0.254: JP54.2B JP54.2A 50.05,112.66 51.32,113.93 51.32,118.58 JP77.1 J71.1
RST3
  Top 0.254: JP80.2B JP80.2A 112.28,112.66 113.55,113.93 113.55,118.58 JP103.1 J95.1
RX
  Top 0.254: J4.1 JP4.1 23.02,46.98 24.65,45.35 JP25.4B JP25.4A
RX1
  Top 0.254: J28.1 JP32.1 85.25,46.98 86.88,45.35 JP27.4B JP27.4A
RX2
  Top 0.254: J52.1 JP58.1 23.02,109.21 24.65,107.58 JP53.4B JP53.4A
RX3
  Top 0.254: J76.1 JP84.1 85.25,109.21 86.88,107.58 JP79.4B JP79.4A
TX
  Top 0.254: J3.1 25.86,61.15 JP3.1 24.65,55.51 24.65,49.16 25.92,47.89 JP25.3B JP25.3A
TX1
  Top 0.254: J27.1 88.09,61.15 JP30.1 86.88,55.51 86.88,49.16 88.15,47.89 JP27.3B JP27.3A
TX2
  Top 0.254: J51.1 25.86,123.38 JP56.1 24.65,117.74 24.65,111.39 25.92,110.12 JP53.3B JP53.3A
TX3
  Top 0.254: J75.1 88.09,123.38 JP82.1 86.88,117.74 86.88,111.39 88.15,110.12 JP79.3B JP79.3A
VBAT
  Top 0.254: JP26.3B JP26.3A 50.05,47.89 52.59,50.43 52.59,52.97 JP15.1 J15.1
VBAT1
  Top 0.254: JP28.3B JP28.3A 112.28,47.89 114.82,50.43 114.82,52.97 JP50.1 J46.1
VBAT2
  Top 0.254: JP54.3B JP54.3A 50.05,110.12 52.59,112.66 52.59,115.2 JP76.1 J70.1
VBAT3
  Top 0.254: JP80.3B JP80.3A 112.28,110.12 114.82,112.66 114.82,115.2 JP102.1 J94.1
VIN
  Top 0.254: JP25.1B JP25.1A 37.35,52.97 38.62,54.24 JP1.1 J1.1
VIN1
  Top 0.254: JP27.1B JP27.1A 99.58,52.97 100.85,54.24 JP29.1 J25.1
VIN2
  Top 0.254: JP53.1B JP53.1A 37.35,115.2 38.62,116.47 JP55.1 J49.1
VIN3
  Top 0.254: JP79.1B JP79.1A 99.58,115.2 100.85,116.47 JP81.1 J73.1
WKP
  Top 0.254: J5.1 17,51.46 JP5.1 19.54,46.65 23.38,42.81 JP25.5B JP25.5A
WKP1
  Top 0.254: J29.1 79.23,51.46 JP33.1 81.77,46.65 85.61,42.81 JP27.5B JP27.5A
WKP2
  Top 0.254: J53.1 17,113.69 JP59.1 19.54,108.88 23.38,105.04 JP53.5B JP53.5A
WKP3
  Top 0.254: J77.1 79.23,113.69 JP85.1 81.77,108.88 85.61,105.04 JP79.5B JP79.5A

## Text on the board
Bottom: V10 | V10 | V10 | V10
tPlace: VIN | VIN | GND | 3V3 | GND | 3V3 | TX | RST | TX | RST | RX | VBAT | RX | VBAT | WKP | GND | WKP | GND | DAC | D7 | DAC | D7 | A5 | D6 | A5 | D6 | Photon / Wearable / Shield | Photon / Wearable / Shield | A4 | D5 | A4 | D5 | A3 | D4 | A3 | D4 | A2 | D3 | A2 | D3 | A1 | D2 | A1 | D2 | A0 | D0 | D1 | A0 | D0 | D1 | VIN | VIN | GND | 3V3 | GND | 3V3 | TX | RST | TX | RST | RX | RX | VBAT | VBAT | WKP | GND | WKP | GND | DAC | D7 | DAC | D7 | A5 | D6 | A5 | D6 | Photon / Wearable / Shield | Photon / Wearable / Shield | A4 | D5 | A4 | D5 | A3 | D4 | A3 | D4 | A2 | D3 | A2 | D3 | A1 | D2 | A1 | D2 | A0 | D1 | A0 | D1 | D0 | D0
bPlace: VIN | VIN | GND | 3V3 | GND | 3V3 | TX | RST | TX | RST | RX | VBAT | RX | VBAT | WKP | GND | WKP | GND | DAC | D7 | DAC | D7 | A5 | D6 | A5 | D6 | A4 | D5 | A4 | D5 | A3 | D4 | A3 | D4 | A2 | D3 | A2 | D3 | A1 | D2 | A1 | D2 | A0 | D1 | A0 | D1 | D0 | D0 | VIN | VIN | GND | 3V3 | GND | 3V3 | TX | RST | TX | RST | RX | RX | VBAT | VBAT | WKP | GND | WKP | GND | DAC | D7 | DAC | D7 | A5 | D6 | A5 | D6 | A4 | D5 | A4 | D5 | A3 | D4 | A3 | D4 | A2 | D3 | A2 | D3 | A1 | D2 | A1 | D2 | A0 | D1 | A0 | D1 | D0 | D0